# Altium PCB Inductor_Box.PcbDoc
Units mil, origin at the board's own origin, x right, y up, seen from the top; angles counter-clockwise.
Board outline 10551.18 x 5511.81 mil, 2 copper layers (Top Layer, Bottom Layer); 20 components, 14 nets, 50 pads, 0 vias.
Unrouted connection lines stored in the file: 5.
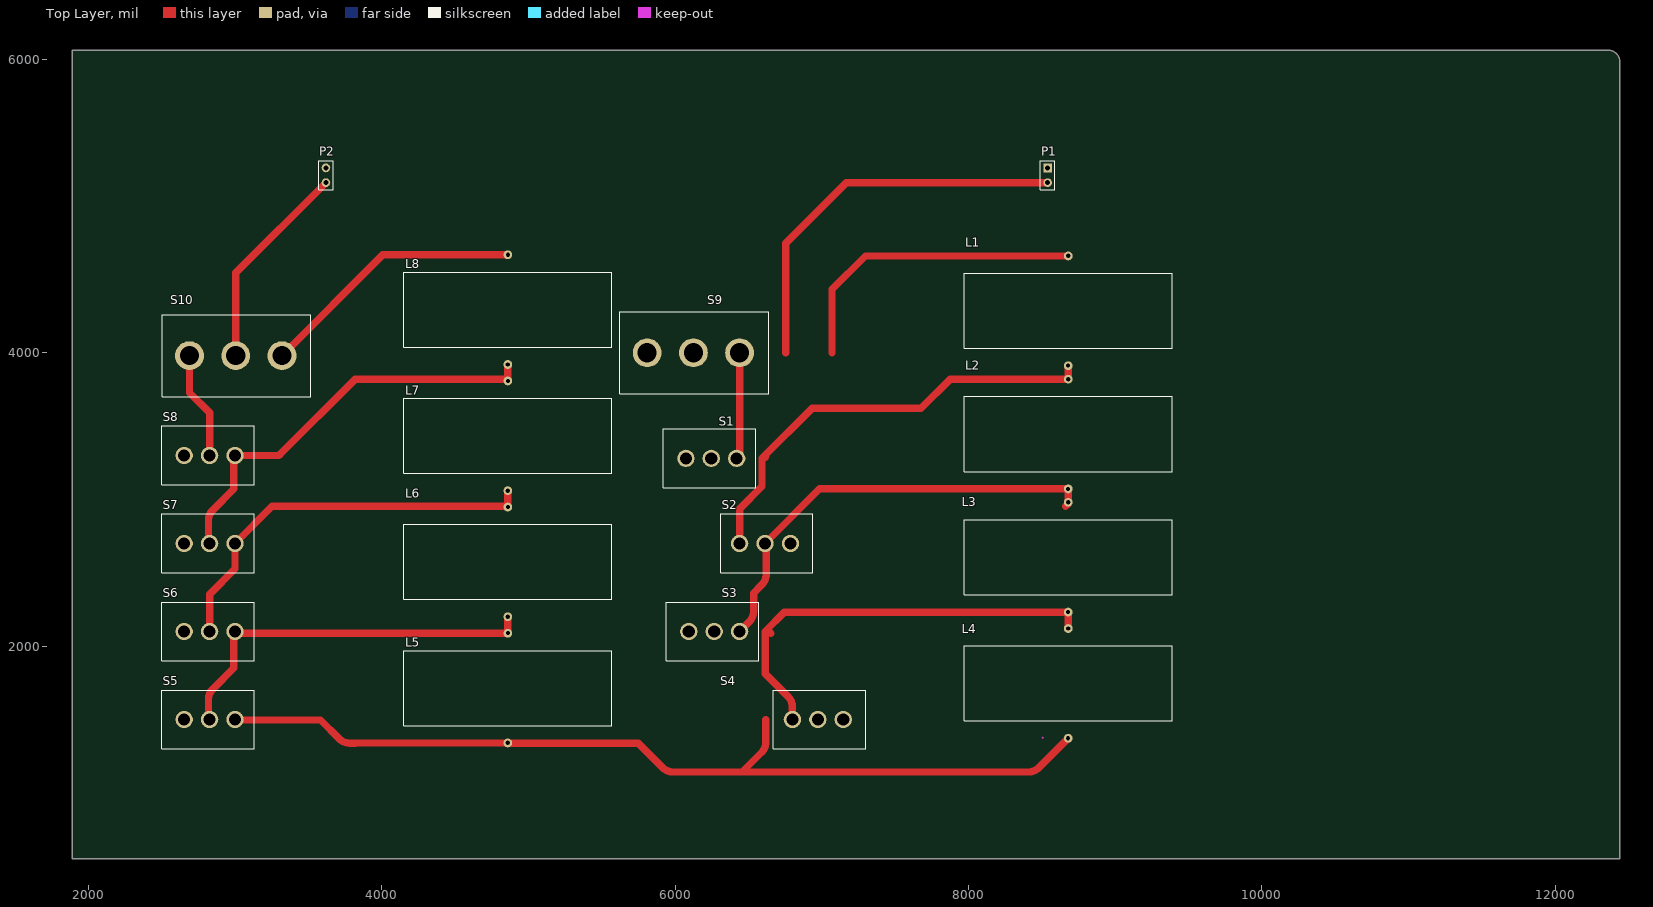
[diagram p0: Top Layer view]
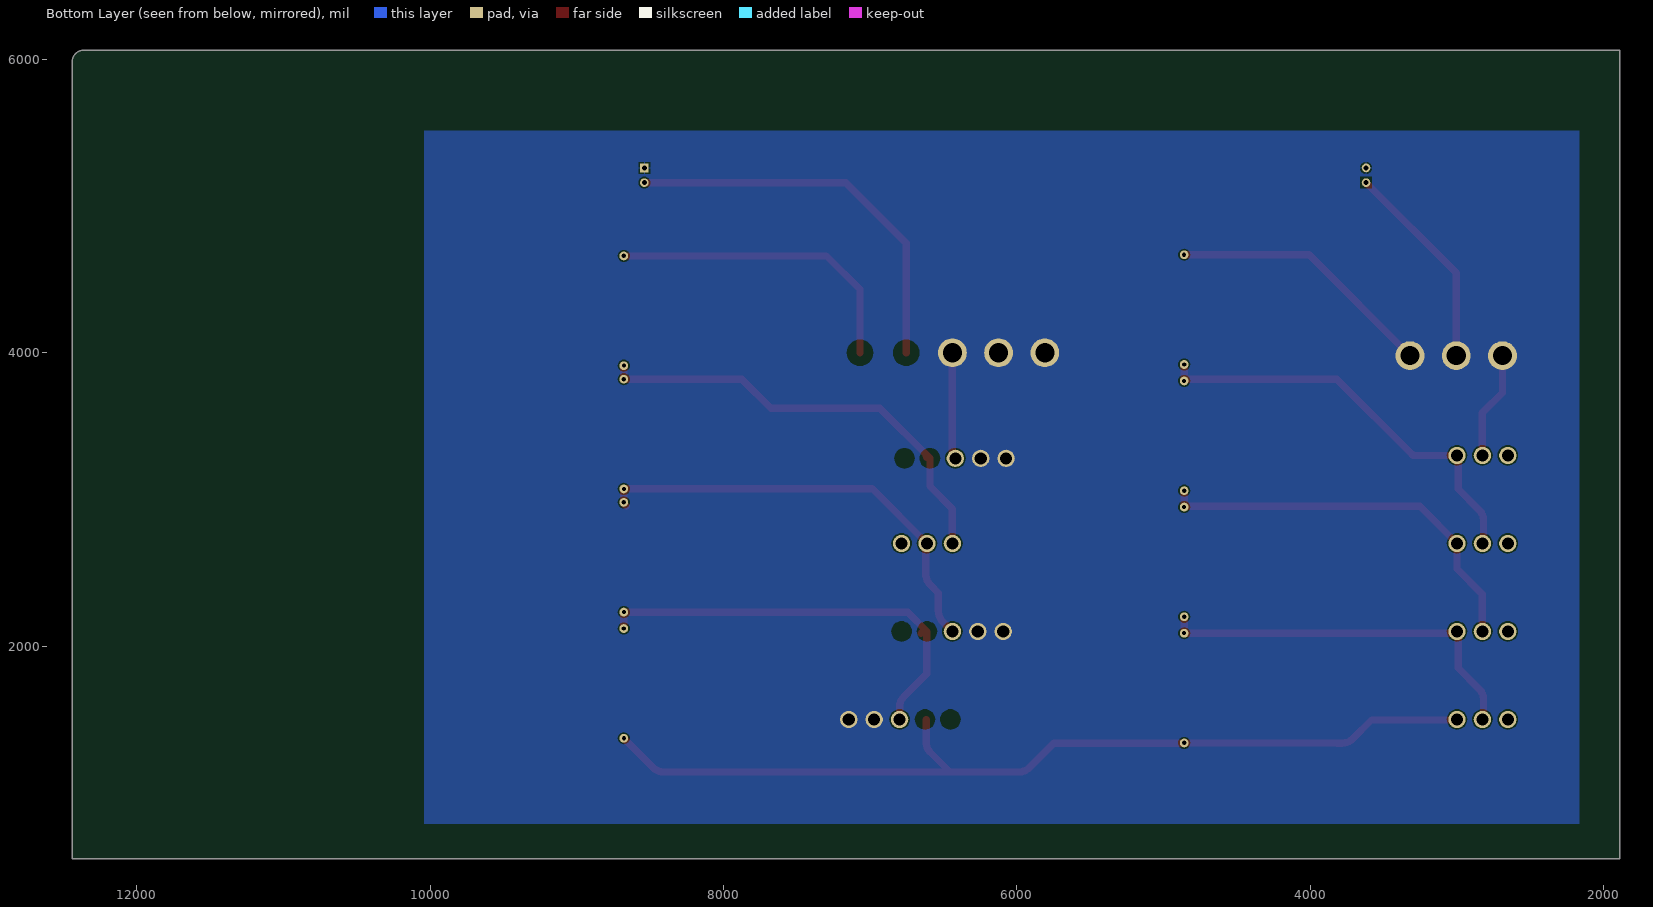
[diagram p1: Bottom Layer view, seen from below]

## Layer stack, top to bottom
Top Layer: signal copper 1.4
Dielectric: dielectric 12.6, FR-4, Dk 4.8
Bottom Layer: signal copper 1.4

## Board outline
1889.76,6062.99 1889.76,551.18 12440.94,551.18 12440.94,5984.25 ccw(c12362.2,5984.25) 12362.2,6062.99 1929.13,6062.99

## Design rules (kind name [scope] priority, off if disabled: settings)
Clearance [All] p1: gap=10
HoleSize [All] p1: absolutevalues=TRUE maxlimit=300 minlimit=1 maxpercent=80.000 minpercent=20.000
PolygonConnect [All] p1: connectstyle=Relief reliefconductorwidth=10 reliefentries=4 polygonreliefangle="90 Angle"
RoutingVias [All] p1: holewidth=28 width=50 viastyle="Through Hole" minholewidth=28 minwidth=50 maxholewidth=28 maxwidth=50
SilkscreenOverComponentPads [All] p1: minsilkscreentomaskgap=10
SolderMaskExpansion [All] p1: expansion=4
Width [All] p1: maxlimit=100 minlimit=50 preferedwidth=50
26 further rules are at their usual default settings.

## Components (designator, comment, footprint, x,y, rotation, side; value= is the part's Value field where it differs from the comment)
L1 "Inductor" "T38 TOROIDAL INDUCTOR" 8680,4660 r270 top
L2 "Inductor" "T38 TOROIDAL INDUCTOR" 8680,3820 r270 top
L3 "Inductor" "T38 TOROIDAL INDUCTOR" 8680,2980 r270 top
L4 "Inductor" "T38 TOROIDAL INDUCTOR" 8680,2120 r270 top
L5 "Inductor" "T38 TOROIDAL INDUCTOR" 4860,1340 r90 top
L6 "Inductor" "T38 TOROIDAL INDUCTOR" 4860,2200 r90 top
L7 "Inductor" "T38 TOROIDAL INDUCTOR" 4860,3060 r90 top
L8 "Inductor" "T38 TOROIDAL INDUCTOR" 4860,3920 r90 top
P1 "Header 1" HDR1X2#1 8540,5260 r270 top
P2 "Header 2" HDR1X2#2 3620,5160 r90 top
S1 "SW-SPST" SPST 6420,3280 r90 top
S2 "SW-SPST" SPST 6440,2700 r270 top
S3 "SW-SPST" SPST 6440,2100 r90 top
S4 "SW-SPST" SPST 6800,1500 r270 top
S5 "SW-SPST" SPST 3000,1500 r90 top
S6 "SW-SPST" SPST 3000,2100 r90 top
S7 "SW-SPST" SPST 3000,2700 r90 top
S8 "SW-SPST" SPST 3000,3300 r90 top
S9 "SW-SPDT" SPDT 6440,4000 r90 top
S10 "SW-SPDT" SPDT 3320,3980 r90 top

## Footprints (in the part's own frame and the unit in brackets; to place one, negate y for a bottom-side part, rotate by r counter-clockwise, add the part's x,y. Pads: shape width x height; smd on the part's side, far side on the other; paste and mask are expansions set on the pad)
HDR1X2#1 [mm] "Connector; Header; 2 Position"
  rect 1.5x1.5 hole 0.9: 1(0,0)
  round 1.5 hole 0.9: 2(2.54,0)
  silkscreen extent -1.27,-1.27 3.81,1.27
HDR1X2#2 [mm] "Connector; Header; 2 Position"
  round 1.5 hole 0.9: 1(0,0) 2(2.54,0)
  silkscreen extent -1.27,-1.27 3.81,1.27
SPDT [mm]
  round 5 hole 3.3: 1(0,0) 2(0,8) 3(0,16)
  silkscreen extent -7.1,-5.03 7.1,20.72
SPST [mm]
  round 3 hole 2.1: 1(0,0) 2(0,4.4) 3(0,8.8)
  silkscreen extent -5.1,-3.3 5.1,12.7
"T38 TOROIDAL INDUCTOR" [mil]
  round 60 hole 30: 1(0,0)
  round 60 hole 27.56: 2(748.03,0)
  silkscreen extent 118,-709 630,709

## Part data
P1: library part "Header 2", "Header, 2-Pin"
P2: "Header, 2-Pin"
S1 S2 S3 S4 S5 S6 S7 S8: "Single-Pole, Single-Throw Switch"
S9 S10: "SPDT Subminiature Toggle Switch, Right Angle Mounting, Vertical Actuation"

## Nets (pads, with @x,y where several pads share a name; then routed paths per layer and width w, separated by ;. In a path a pad name is that pad's centre, name@x,y a point inside that pad or via, vN(x,y) a via of type N, cw(c..) or ccw(c..) an arc to the next point about the centre after c; other vN are vias at no path point)
GND: P1.1 P2.2
NetL1_1: L1.1 S9.3 | length 2136.6
  Top Layer w50: 7069.92,4000 7069.92,4432.13 7297.8,4660 L1.1
NetL1_2: L1.2 L2.1 S1.2 S2.1 | length 3058.6
  Top Layer w50: S2.1 6440,2936.06 6593.23,3089.29 6593.23,3280 6935.28,3622.05 7677.17,3622.05 7875.12,3820 L2.1 L1.2 ; 6614.17,3288.59 cw(c6630.3,3288.59) 6618.9,3300
NetL2_2: L2.2 L3.1 S2.2 S3.1 | length 3013.3
  Top Layer w50: S3.1 6506.14,2166.14 ccw(c6435.43,2236.85) 6535.43,2236.85 6535.43,2362.2 6591.81,2418.58 ccw(c6521.1,2489.3) 6621.1,2489.3 S2.2@6621.1,2700 ; S2.2 6985.2,3071.97 L2.2 L3.1 cw(c8659.09,2980) 8673.88,2965.21 8661.42,2952.76
NetL3_2: L3.2 L4.1 S3.2 S4.1 | length 2944.1
  Top Layer w50: 6613.23,2100 6745.2,2231.97 L3.2 L4.1 ; 6653.63,2086.53 ccw(c6621.1,2054) 6621.1,2100 ccw(c6637.83,2083.27) 6614.17,2083.27 6614.17,1811.02 6770.71,1654.49 cw(c6700,1583.78) 6800,1583.78 S4.1
NetL4_2: L4.2 L5.1 S4.2 S5.1 | length 6342.7
  Top Layer w50: 6618.9,1500 6618.9,1345.36 cw(c6518.9,1345.36) 6589.61,1274.65 6456.69,1141.73 ; L4.2 8479.05,1171.02 cw(c8408.34,1241.73) 8408.34,1141.73 6456.69,1141.73 ; S5.1@3009.5,1496.06 cw(c3009.5,1509.5) S5.1 ccw(c3009.5,1509.5) S5.1@3009.5,1496.06 ; S5.1@3009.5,1496.06 3582.68,1496.06 3710.87,1367.87 ccw(c3781.58,1438.58) 3781.58,1338.58 3818.9,1338.58 cw(c3822.32,1335.16) 3822.32,1340 L5.1 ccw(c4863.42,1343.42) 4863.42,1338.58 5748.03,1338.58 5915.59,1171.02 ccw(c5986.3,1241.73) 5986.3,1141.73 6456.69,1141.73
NetL5_2: L5.2 L6.1 S5.2 S6.1 | length 2644.7
  Top Layer w50: S5.2@2818.9,1500 2818.9,1635.74 cw(c2918.9,1635.74) 2848.19,1706.45 2992.13,1850.39 2992.13,2080.99 cw(c3019.01,2080.99) S6.1 ccw(c3028.89,2128.89) 3028.89,2088.03 L5.2 L6.1
NetL6_2: L6.2 L7.1 S6.2 S7.1 | length 2799.6
  Top Layer w50: S6.2 2826.77,2354.33 3000,2527.56 S7.1 ; S7.1@3000,2656.8 S7.1 ; L6.2@4855.28,2952.76 L6.2@4848.59,2952.76 ; L7.1 L6.2 ccw(c4848.59,2936.63) L6.2@4848.59,2952.76 ; S7.1 3252.76,2952.76 L6.2@4848.59,2952.76
NetL7_2: L7.2 L8.1 S7.2 S8.1 | length 2858.3
  Top Layer w50: S7.2@2818.9,2700 2818.9,2856.22 cw(c2918.9,2856.22) 2848.19,2926.93 2992.13,3070.87 2992.13,3280.99 cw(c3019.01,3280.99) S8.1 3289.98,3300 ccw(c3289.98,3324.2) 3307.09,3307.09 3818.9,3818.9 4833.77,3818.9 cw(c4833.77,3781.8) L7.2 L8.1
NetL8_2: L8.2 S10.1 | length 1825
  Top Layer w50: S10.1 4008.03,4668.03 L8.2
NetP1_2: P1.2 S9.2 | length 2703.2
  Top Layer w50: 6754.96,4000 6754.96,4747.09 7167.87,5160 P1.2
NetP2_1: P2.1 S10.2 | length 1469.4
  Top Layer w50: S10.2@2992.13,4011.18 ccw(c3036.22,4011.18) S10.2 3005.04,4545.04 P2.1
NetS1_1: S1.1 S9.1 | length 660
  Top Layer w50: S1.1@6440,3320 S9.1@6440,3980
NetS8_2: S8.2 S10.3 | length 736.6
  Top Layer w50: S10.3 2690.08,3727.24 2826.77,3590.55 S8.2
pads on no net: S1.3 S2.3 S3.3 S4.3 S5.3 S6.3 S7.3 S8.3

## Polygon pours and split planes (outlines as drawn)
GND on Bottom Layer "GND" (solid, pour order 1000): 2165.35,5511.81 10039.37,5511.81 10039.37,787.4 2165.35,787.4 2165.35,5511.81

## Keep-outs
Top Layer:
  lines w10: 8503.94,1377.95 8509.92,1371.97

## Silkscreen, mask and mechanical layers (free items; w line width, h text height)
Mechanical 1:
  lines w50: 2165.35,787.4 2165.35,5511.81 10039.37,5511.81 10039.37,787.4 2165.35,787.4